# EAGLE board SEED_SOLD_SENSORS (EAGLE 7.6.0)
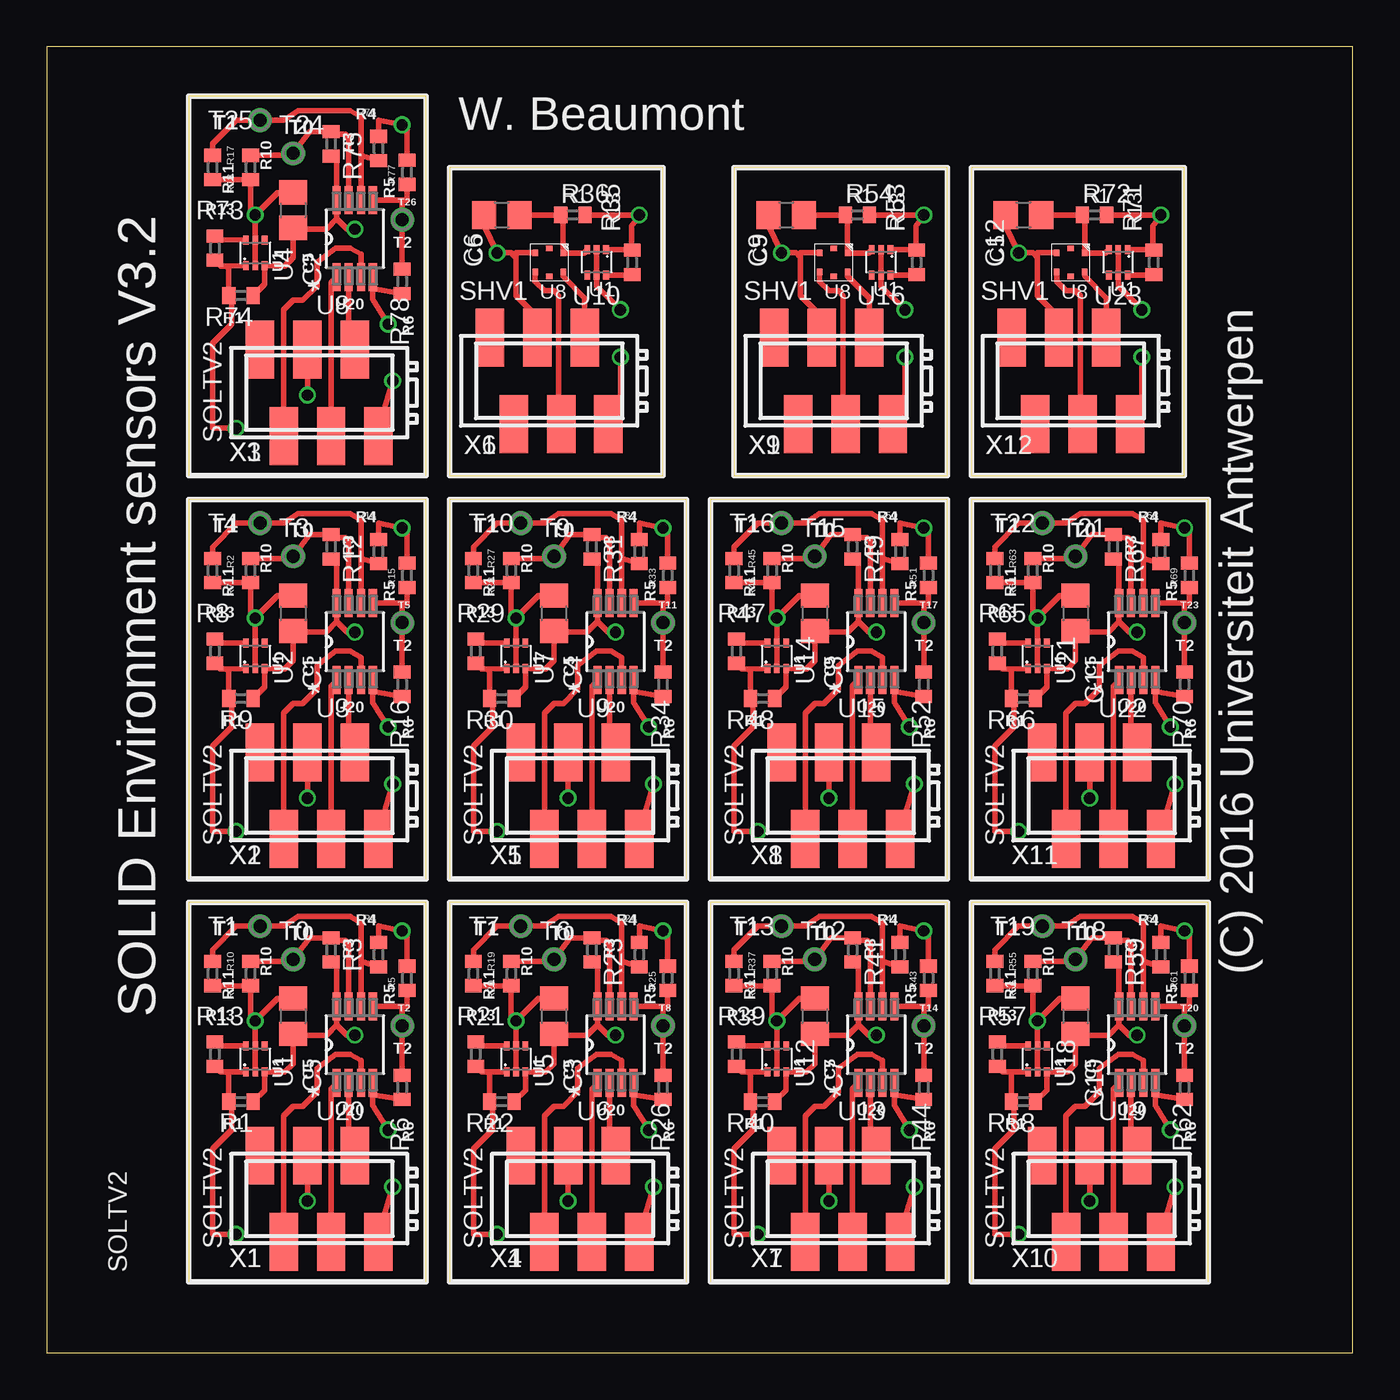
[diagram p0: board, top side]
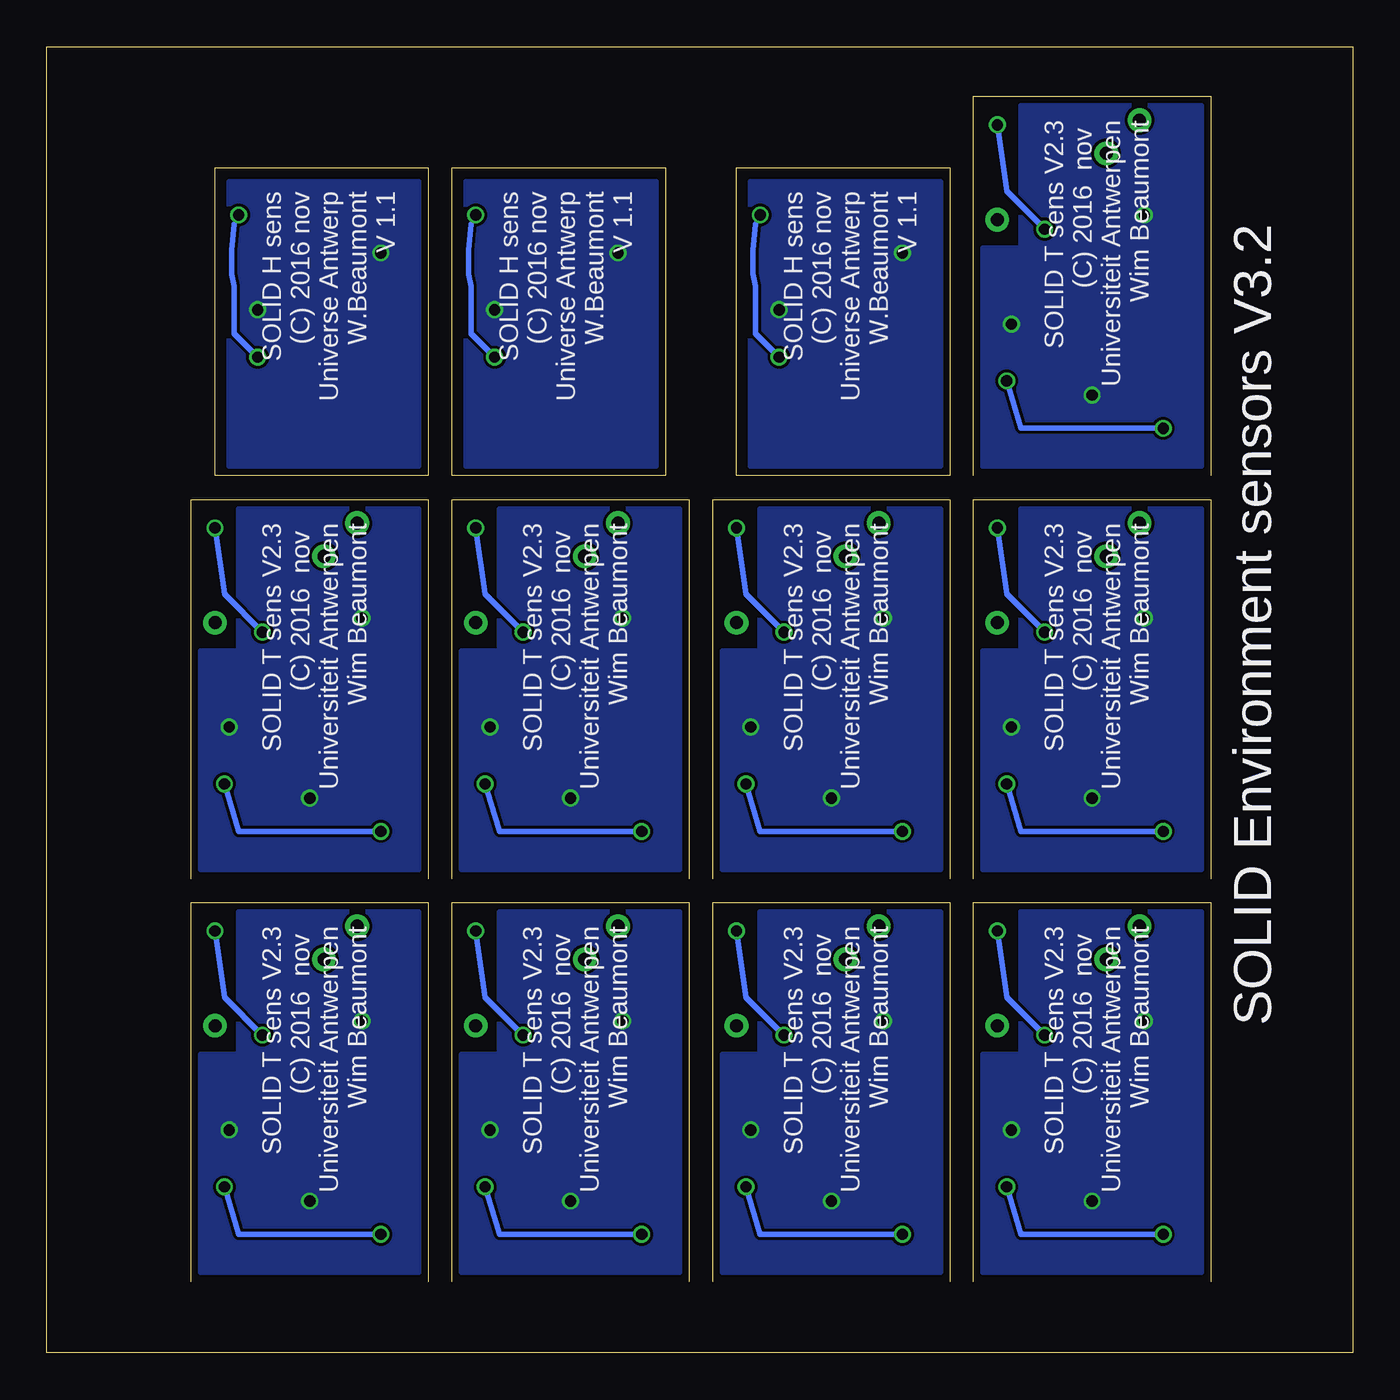
[diagram p1: board, bottom side, seen from below]

Size 69.98 x 69.98 mm. Coordinates in mm from the lower left corner, seen from the top.
Outline: 20.32,3.81 20.32,24.13 7.62,24.13 7.62,3.81
Outline: 20.32,25.4 20.32,45.72 7.62,45.72 7.62,25.4
Outline: 34.29,3.81 34.29,24.13 21.59,24.13 21.59,3.81
Outline: 34.29,25.4 34.29,45.72 21.59,45.72 21.59,25.4
Outline: 48.26,3.81 48.26,24.13 35.56,24.13 35.56,3.81
Outline: 48.26,25.4 48.26,45.72 35.56,45.72 35.56,25.4
Outline: 62.23,3.81 62.23,24.13 49.53,24.13 49.53,3.81
Outline: 62.23,25.4 62.23,45.72 49.53,45.72 49.53,25.4
Outline: 20.32,46.99 20.32,67.31 7.62,67.31 7.62,46.99
Outline: 0,0 69.98,0 69.98,69.98 0,69.98 0,0
Outline: 21.59,46.99 33.02,46.99 33.02,63.5 21.59,63.5 21.59,46.99
Outline: 36.83,46.99 48.26,46.99 48.26,63.5 36.83,63.5 36.83,46.99
Outline: 49.53,46.99 60.96,46.99 60.96,63.5 49.53,63.5 49.53,46.99
Copper layers (1*16): Top 0.035mm / dielectric 1.5mm / Bottom 0.035mm
Design rules "SeeedStudio_2layer_DRU_no_angle_20140221": minimum track width 6mil, minimum drill 12mil, track to track 6mil, track to pad 6mil, pad to pad 6mil, via to via 6mil, smd to smd 0mil, copper to edge 10mil, drill to drill 10mil, minimum pad ring 10mil, minimum via ring 6mil, stop-mask expansion 2mil, vias tented up to drill 100mil, thermal gap 10mil

## Footprints (pad centres in the part's own frame; a part is rotated, then mirrored left to right if it is on the bottom)
C0805 = smd 1.3 x 1.5: 1 -0.95,0; 2 0.95,0
R0402 = smd 0.7 x 0.9: 1 -0.65,0; 2 0.65,0
UA_P1-13 = drill 0.7 pad 1.27: TP 0,0
SOT563 = smd 0.305 x 0.483: 1 -0.5,-0.686; 2 0,-0.686; 3 0.5,-0.686; 4 0.5,0.686; 5 0,0.686; 6 -0.5,0.686
SOP65P490X110-8N = smd 1.499 x 0.432: 1 -2.057,0.965; 2 -2.057,0.33; 3 -2.057,-0.33; 4 -2.057,-0.965; 5 2.057,-0.965; 6 2.057,-0.33; 7 2.057,0.33; 8 2.057,0.965
HLGA-6 = smd 0.3 x 0.35: 1 0.75,0.5; 2 0.75,-0.5; 4 -0.75,-0.5; 5 -0.75,0.5 | smd 0.35 x 0.3: 3 0,-0.75; 6 0,0.75
MICROMATCH_SMD-6 = smd 1.524 x 3.1: 1 3.175,-2.311; 2 1.905,2.311; 3 0.635,-2.311; 4 -0.635,2.311; 5 -1.905,-2.311; 6 -3.175,2.311

## Placement (x,y rotation side)
C1  100n  [C0805]  13.21,39.62 270 top
C2  100n  [C0805]  13.21,61.21 270 top
C3  100n  [C0805]  27.18,18.03 270 top
C4  100n  [C0805]  27.18,39.62 270 top
C5  100n  [C0805]  13.21,18.03 270 top
C6  100n  [C0805]  24.38,60.96 0 top
C7  100n  [C0805]  41.15,18.03 270 top
C8  100n  [C0805]  41.15,39.62 270 top
C9  100n  [C0805]  39.62,60.96 0 top
C10  100n  [C0805]  55.12,18.03 270 top
C11  100n  [C0805]  55.12,39.62 270 top
C12  100n  [C0805]  52.32,60.96 0 top
R1  0R  [R0402]  10.41,13.46 180 top
R2  1K  [R0402]  10.92,41.91 90 top
R3  10K  [R0402]  15.24,21.59 270 top
R4  10K  [R0402]  17.78,21.34 90 top
R5  10K  [R0402]  19.3,20.07 90 top
R6  1K  [R0402]  19.05,14.22 90 top
R7  1K  [R0402]  8.89,41.91 90 top
R8  10K  [R0402]  9.02,37.59 270 top
R9  0R  [R0402]  10.41,35.05 180 top
R10  1K  [R0402]  10.92,20.32 90 top
R11  1K  [R0402]  8.89,20.32 90 top
R12  10K  [R0402]  15.24,43.18 270 top
R13  10K  [R0402]  9.02,16 270 top
R14  10K  [R0402]  17.78,42.93 90 top
R15  10K  [R0402]  19.3,41.66 90 top
R16  1K  [R0402]  19.05,35.81 90 top
R17  1K  [R0402]  10.92,63.5 90 top
R18  1K  [R0402]  8.89,63.5 90 top
R19  1K  [R0402]  24.89,20.32 90 top
R20  1K  [R0402]  22.86,20.32 90 top
R21  10K  [R0402]  22.99,16 270 top
R22  0R  [R0402]  24.38,13.46 180 top
R23  10K  [R0402]  29.21,21.59 270 top
R24  10K  [R0402]  31.75,21.34 90 top
R25  10K  [R0402]  33.27,20.07 90 top
R26  1K  [R0402]  33.02,14.22 90 top
R27  1K  [R0402]  24.89,41.91 90 top
R28  1K  [R0402]  22.86,41.91 90 top
R29  10K  [R0402]  22.99,37.59 270 top
R30  0R  [R0402]  24.38,35.05 180 top
R31  10K  [R0402]  29.21,43.18 270 top
R32  10K  [R0402]  31.75,42.93 90 top
R33  10K  [R0402]  33.27,41.66 90 top
R34  1K  [R0402]  33.02,35.81 90 top
R35  10K  [R0402]  31.37,58.42 90 top
R36  10K  [R0402]  28.19,60.96 0 top
R37  1K  [R0402]  38.86,20.32 90 top
R38  1K  [R0402]  36.83,20.32 90 top
R39  10K  [R0402]  36.96,16 270 top
R40  0R  [R0402]  38.35,13.46 180 top
R41  10K  [R0402]  43.18,21.59 270 top
R42  10K  [R0402]  45.72,21.34 90 top
R43  10K  [R0402]  47.24,20.07 90 top
R44  1K  [R0402]  46.99,14.22 90 top
R45  1K  [R0402]  38.86,41.91 90 top
R46  1K  [R0402]  36.83,41.91 90 top
R47  10K  [R0402]  36.96,37.59 270 top
R48  0R  [R0402]  38.35,35.05 180 top
R49  10K  [R0402]  43.18,43.18 270 top
R50  10K  [R0402]  45.72,42.93 90 top
R51  10K  [R0402]  47.24,41.66 90 top
R52  1K  [R0402]  46.99,35.81 90 top
R53  10K  [R0402]  46.61,58.42 90 top
R54  10K  [R0402]  43.43,60.96 0 top
R55  1K  [R0402]  52.83,20.32 90 top
R56  1K  [R0402]  50.8,20.32 90 top
R57  10K  [R0402]  50.93,16 270 top
R58  0R  [R0402]  52.32,13.46 180 top
R59  10K  [R0402]  57.15,21.59 270 top
R60  10K  [R0402]  59.69,21.34 90 top
R61  10K  [R0402]  61.21,20.07 90 top
R62  1K  [R0402]  60.96,14.22 90 top
R63  1K  [R0402]  52.83,41.91 90 top
R64  1K  [R0402]  50.8,41.91 90 top
R65  10K  [R0402]  50.93,37.59 270 top
R66  0R  [R0402]  52.32,35.05 180 top
R67  10K  [R0402]  57.15,43.18 270 top
R68  10K  [R0402]  59.69,42.93 90 top
R69  10K  [R0402]  61.21,41.66 90 top
R70  1K  [R0402]  60.96,35.81 90 top
R71  10K  [R0402]  59.31,58.42 90 top
R72  10K  [R0402]  56.13,60.96 0 top
R73  10K  [R0402]  9.02,59.18 270 top
R74  0R  [R0402]  10.41,56.64 180 top
R75  10K  [R0402]  15.24,64.77 270 top
R76  10K  [R0402]  17.78,64.52 90 top
R77  10K  [R0402]  19.3,63.25 90 top
R78  1K  [R0402]  19.05,57.4 90 top
T0  UA_TPPAD1-13  [UA_P1-13]  13.21,21.08 0 top
T1  UA_TPPAD1-13  [UA_P1-13]  11.43,22.86 0 top
T2  UA_TPPAD1-13  [UA_P1-13]  19.05,17.53 0 top
T3  UA_TPPAD1-13  [UA_P1-13]  13.21,42.67 0 top
T4  UA_TPPAD1-13  [UA_P1-13]  11.43,44.45 0 top
T5  UA_TPPAD1-13  [UA_P1-13]  19.05,39.12 0 top
T6  UA_TPPAD1-13  [UA_P1-13]  27.18,21.08 0 top
T7  UA_TPPAD1-13  [UA_P1-13]  25.4,22.86 0 top
T8  UA_TPPAD1-13  [UA_P1-13]  33.02,17.53 0 top
T9  UA_TPPAD1-13  [UA_P1-13]  27.18,42.67 0 top
T10  UA_TPPAD1-13  [UA_P1-13]  25.4,44.45 0 top
T11  UA_TPPAD1-13  [UA_P1-13]  33.02,39.12 0 top
T12  UA_TPPAD1-13  [UA_P1-13]  41.15,21.08 0 top
T13  UA_TPPAD1-13  [UA_P1-13]  39.37,22.86 0 top
T14  UA_TPPAD1-13  [UA_P1-13]  46.99,17.53 0 top
T15  UA_TPPAD1-13  [UA_P1-13]  41.15,42.67 0 top
T16  UA_TPPAD1-13  [UA_P1-13]  39.37,44.45 0 top
T17  UA_TPPAD1-13  [UA_P1-13]  46.99,39.12 0 top
T18  UA_TPPAD1-13  [UA_P1-13]  55.12,21.08 0 top
T19  UA_TPPAD1-13  [UA_P1-13]  53.34,22.86 0 top
T20  UA_TPPAD1-13  [UA_P1-13]  60.96,17.53 0 top
T21  UA_TPPAD1-13  [UA_P1-13]  55.12,42.67 0 top
T22  UA_TPPAD1-13  [UA_P1-13]  53.34,44.45 0 top
T23  UA_TPPAD1-13  [UA_P1-13]  60.96,39.12 0 top
T24  UA_TPPAD1-13  [UA_P1-13]  13.21,64.26 0 top
T25  UA_TPPAD1-13  [UA_P1-13]  11.43,66.04 0 top
T26  UA_TPPAD1-13  [UA_P1-13]  19.05,60.71 0 top
U1  NCP170_3V3  [SOT563]  11.18,15.75 0 top
U2  NCP170_3V3  [SOT563]  11.18,37.34 0 top
U3  AT30TSE752-XM8-B  [SOP65P490X110-8N]  16.51,38.1 90 top
U4  NCP170_3V3  [SOT563]  11.18,58.93 0 top
U5  NCP170_3V3  [SOT563]  25.15,15.75 0 top
U6  AT30TSE752-XM8-B  [SOP65P490X110-8N]  30.48,16.51 90 top
U7  NCP170_3V3  [SOT563]  25.15,37.34 0 top
U8  AT30TSE752-XM8-B  [SOP65P490X110-8N]  16.51,59.69 90 top
U9  AT30TSE752-XM8-B  [SOP65P490X110-8N]  30.48,38.1 90 top
U10  NCP170_3V3  [SOT563]  29.46,58.42 180 top
U11  HTS221  [HLGA-6]  26.92,58.42 0 top
U12  NCP170_3V3  [SOT563]  39.12,15.75 0 top
U13  AT30TSE752-XM8-B  [SOP65P490X110-8N]  44.45,16.51 90 top
U14  NCP170_3V3  [SOT563]  39.12,37.34 0 top
U15  AT30TSE752-XM8-B  [SOP65P490X110-8N]  44.45,38.1 90 top
U16  NCP170_3V3  [SOT563]  44.7,58.42 180 top
U17  HTS221  [HLGA-6]  42.16,58.42 0 top
U18  NCP170_3V3  [SOT563]  53.09,15.75 0 top
U19  AT30TSE752-XM8-B  [SOP65P490X110-8N]  58.42,16.51 90 top
U20  AT30TSE752-XM8-B  [SOP65P490X110-8N]  16.51,16.51 90 top
U21  NCP170_3V3  [SOT563]  53.09,37.34 0 top
U22  AT30TSE752-XM8-B  [SOP65P490X110-8N]  58.42,38.1 90 top
U23  NCP170_3V3  [SOT563]  57.4,58.42 180 top
U24  HTS221  [HLGA-6]  54.86,58.42 0 top
X1  MICROMATCH-6SMD  [MICROMATCH_SMD-6]  14.61,8.26 0 top
X2  MICROMATCH-6SMD  [MICROMATCH_SMD-6]  14.61,29.84 0 top
X3  MICROMATCH-6SMD  [MICROMATCH_SMD-6]  14.61,51.44 0 top
X4  MICROMATCH-6SMD  [MICROMATCH_SMD-6]  28.57,8.26 0 top
X5  MICROMATCH-6SMD  [MICROMATCH_SMD-6]  28.57,29.84 0 top
X6  MICROMATCH-6SMD  [MICROMATCH_SMD-6]  26.92,52.07 0 top
X7  MICROMATCH-6SMD  [MICROMATCH_SMD-6]  42.55,8.26 0 top
X8  MICROMATCH-6SMD  [MICROMATCH_SMD-6]  42.55,29.84 0 top
X9  MICROMATCH-6SMD  [MICROMATCH_SMD-6]  42.16,52.07 0 top
X10  MICROMATCH-6SMD  [MICROMATCH_SMD-6]  56.52,8.26 0 top
X11  MICROMATCH-6SMD  [MICROMATCH_SMD-6]  56.52,29.84 0 top
X12  MICROMATCH-6SMD  [MICROMATCH_SMD-6]  54.86,52.07 0 top

## Library data of the parts
C1-C12 = rcl; PARTNO: *
R1-R78 = rcl
T0 T1-T26 = UA_v2; PARTNO: *
U1 U2 U4 U5 U7 U10 U12 U14 U16 U18 U21 U23 = UA_v2; MPN: NCP170AXV330T2G; OC_FARNELL: 2507604; SUPPLIER: ON
U3 U6 U8 U9 U13 U15 U19 U20 U22 = at305sse752; MPN: AT30TSE752-XM8-B; OC_FARNELL: 2115206; OC_NEWARK: Unknown; PACKAGE: MSOP-8; SUPPLIER: ATMEL
U11 U17 U24 = chips; MPN: HTS221; OC_FARNELL: 2433085; SUPPLIER: ST
X1-X12 = ua_cmp; MPN: 7-188275-6; OC_FARNELL: 1056234

## Nets
GND: C5.1 R6.1 R10.1 R11.1 U1.2 U1.5 U20.4 X1.4
GND1: C1.1 R2.1 R7.1 R16.1 U2.2 U2.5 U3.4 X2.4
GND2: C2.1 R17.1 R18.1 R78.1 U4.2 U4.5 U8.4 X3.4
GND3: C3.1 R19.1 R20.1 R26.1 U5.2 U5.5 U6.4 X4.4
GND4: C4.1 R27.1 R28.1 R34.1 U7.2 U7.5 U9.4 X5.4
GND5: C6.1 U10.2 U10.5 U11.5 X6.4
GND6: C7.1 R37.1 R38.1 R44.1 U12.2 U12.5 U13.4 X7.4
GND7: C8.1 R45.1 R46.1 R52.1 U14.2 U14.5 U15.4 X8.4
GND8: C9.1 U16.2 U16.5 U17.5 X9.4
GND9: C10.1 R55.1 R56.1 R62.1 U18.2 U18.5 U19.4 X10.4
GND10: C11.1 R63.1 R64.1 R70.1 U21.2 U21.5 U22.4 X11.4
GND11: C12.1 U23.2 U23.5 U24.5 X12.4
N$1: R5.1 R6.2 T2.TP U20.5
N$2: R4.1 R11.2 T1.TP U20.6
N$3: R3.1 R10.2 T0.TP U20.7
N$4: R8.1 U2.6
N$5: R15.1 R16.2 T5.TP U3.5
N$6: R7.2 R14.1 T4.TP U3.6
N$7: R13.1 U1.6
N$8: R2.2 R12.1 T3.TP U3.7
N$9: R73.1 U4.6
N$10: R21.1 U5.6
N$11: R25.1 R26.2 T8.TP U6.5
N$12: R20.2 R24.1 T7.TP U6.6
N$13: R19.2 R23.1 T6.TP U6.7
N$14: R29.1 U7.6
N$15: R33.1 R34.2 T11.TP U9.5
N$16: R28.2 R32.1 T10.TP U9.6
N$17: R27.2 R31.1 T9.TP U9.7
N$18: R35.1 U10.6
N$19: R39.1 U12.6
N$20: R43.1 R44.2 T14.TP U13.5
N$21: R38.2 R42.1 T13.TP U13.6
N$22: R37.2 R41.1 T12.TP U13.7
N$23: R47.1 U14.6
N$24: R51.1 R52.2 T17.TP U15.5
N$25: R46.2 R50.1 T16.TP U15.6
N$26: R45.2 R49.1 T15.TP U15.7
N$27: R53.1 U16.6
N$28: R57.1 U18.6
N$29: R61.1 R62.2 T20.TP U19.5
N$30: R56.2 R60.1 T19.TP U19.6
N$31: R55.2 R59.1 T18.TP U19.7
N$32: R65.1 U21.6
N$33: R69.1 R70.2 T23.TP U22.5
N$34: R64.2 R68.1 T22.TP U22.6
N$35: R63.2 R67.1 T21.TP U22.7
N$36: R71.1 U23.6
N$37: R77.1 R78.2 T26.TP U8.5
N$38: R18.2 R76.1 T25.TP U8.6
N$39: R17.2 R75.1 T24.TP U8.7
SCL_L: U20.2 X1.2
SCL_L1: U3.2 X2.2
SCL_L2: U8.2 X3.2
SCL_L3: U6.2 X4.2
SCL_L4: U9.2 X5.2
SCL_L5: U11.2 X6.2
SCL_L6: U13.2 X7.2
SCL_L7: U15.2 X8.2
SCL_L8: U17.2 X9.2
SCL_L9: U19.2 X10.2
SCL_L10: U22.2 X11.2
SCL_L11: U24.2 X12.2
SDA_L: U20.1 X1.3
SDA_L1: U3.1 X2.3
SDA_L2: U8.1 X3.3
SDA_L3: U6.1 X4.3
SDA_L4: U9.1 X5.3
SDA_L5: U11.4 X6.3
SDA_L6: U13.1 X7.3
SDA_L7: U15.1 X8.3
SDA_L8: U17.4 X9.3
SDA_L9: U19.1 X10.3
SDA_L10: U22.1 X11.3
SDA_L11: U24.4 X12.3
TALERT: U20.3 X1.5
TALERT1: U3.3 X2.5
TALERT2: U8.3 X3.5
TALERT3: U6.3 X4.5
TALERT4: U9.3 X5.5
TALERT5: X6.5
TALERT6: U13.3 X7.5
TALERT7: U15.3 X8.5
TALERT8: X9.5
TALERT9: U19.3 X10.5
TALERT10: U22.3 X11.5
TALERT11: X12.5
V3_3L: C5.2 R1.1 R3.2 R4.2 R5.2 U1.3 U20.8
V3_3L1: C1.2 R9.1 R12.2 R14.2 R15.2 U2.3 U3.8
V3_3L2: C2.2 R74.1 R75.2 R76.2 R77.2 U4.3 U8.8
V3_3L3: C3.2 R22.1 R23.2 R24.2 R25.2 U5.3 U6.8
V3_3L4: C4.2 R30.1 R31.2 R32.2 R33.2 U7.3 U9.8
V3_3L5: C6.2 R36.1 U10.3 U11.1
V3_3L6: C7.2 R40.1 R41.2 R42.2 R43.2 U12.3 U13.8
V3_3L7: C8.2 R48.1 R49.2 R50.2 R51.2 U14.3 U15.8
V3_3L8: C9.2 R54.1 U16.3 U17.1
V3_3L9: C10.2 R58.1 R59.2 R60.2 R61.2 U18.3 U19.8
V3_3L10: C11.2 R66.1 R67.2 R68.2 R69.2 U21.3 U22.8
V3_3L11: C12.2 R72.1 U23.3 U24.1
V5F: R1.2 R13.2 U1.1 X1.1
V5F1: R8.2 R9.2 U2.1 X2.1
V5F2: R73.2 R74.2 U4.1 X3.1
V5F3: R21.2 R22.2 U5.1 X4.1
V5F4: R29.2 R30.2 U7.1 X5.1
V5F5: R35.2 R36.2 U10.1 X6.1
V5F6: R39.2 R40.2 U12.1 X7.1
V5F7: R47.2 R48.2 U14.1 X8.1
V5F8: R53.2 R54.2 U16.1 X9.1
V5F9: R57.2 R58.2 U18.1 X10.1
V5F10: R65.2 R66.2 U21.1 X11.1
V5F11: R71.2 R72.2 U23.1 X12.1

## Tracks (layer width: path | path; a pad name or v marks a point on that pad's centre or on a via)
GND  (via drill 0.6)
  Top 0.305: v18.29,11.94 17.48,13.26 U20.4 17.48,13.83 R6.1 | U1.2 U1.5 v11.18,17.78 | v13.97,8.13 X1.4 | C5.1 12.38,18.98 v11.18,17.78 | R11.1 R10.1 10.92,18.03 v11.18,17.78
  pour Bottom: 8.13,23.62 8.13,4.32 19.81,4.32 19.81,16 17.78,16 17.78,23.62
GND1  (via drill 0.6)
  Top 0.305: v18.29,33.53 17.48,34.85 U3.4 17.48,35.42 R16.1 | U2.2 U2.5 v11.18,39.37 | v13.97,29.72 X2.4 | C1.1 12.38,40.57 v11.18,39.37 | R7.1 R2.1 10.92,39.62 v11.18,39.37
  pour Bottom: 8.13,45.21 8.13,25.91 19.81,25.91 19.81,37.59 17.78,37.59 17.78,45.21
GND2  (via drill 0.6)
  Top 0.305: v18.29,55.12 17.48,56.44 U8.4 17.48,57.01 R78.1 | U4.2 U4.5 v11.18,60.96 | v13.97,51.31 X3.4 | C2.1 12.38,62.16 v11.18,60.96 | R18.1 R17.1 10.92,61.21 v11.18,60.96
  pour Bottom: 8.13,66.8 8.13,47.5 19.81,47.5 19.81,59.18 17.78,59.18 17.78,66.8
GND3  (via drill 0.6)
  Top 0.305: v32.26,11.94 31.45,13.26 U6.4 31.45,13.83 R26.1 | U5.2 U5.5 v25.15,17.78 | v27.94,8.13 X4.4 | C3.1 26.35,18.98 v25.15,17.78 | R20.1 R19.1 24.89,18.03 v25.15,17.78
  pour Bottom: 22.1,23.62 22.1,4.32 33.78,4.32 33.78,16 31.75,16 31.75,23.62
GND4  (via drill 0.6)
  Top 0.305: v32.26,33.53 31.45,34.85 U9.4 31.45,35.42 R34.1 | U7.2 U7.5 v25.15,39.37 | v27.94,29.72 X5.4 | C4.1 26.35,40.57 v25.15,39.37 | R28.1 R27.1 24.89,39.62 v25.15,39.37
  pour Bottom: 22.1,45.21 22.1,25.91 33.78,25.91 33.78,37.59 31.75,37.59 31.75,45.21
GND5  (via drill 0.6)
  Top 0.305: X6.4 26.29,55.5 25.15,56.64 25.15,58.67 | 25.15,58.67 25.15,58.93 U11.5 | C6.1 23.43,60.39 v24.13,58.93 24.89,58.93 25.15,58.67 | U10.2 U10.5 29.46,57.15 v30.73,55.88
  pour Bottom: 22.1,62.74 32.26,62.74 32.26,47.5 22.1,47.5
GND6  (via drill 0.6)
  Top 0.305: v46.23,11.94 45.41,13.26 U13.4 45.41,13.83 R44.1 | U12.2 U12.5 v39.12,17.78 | v41.91,8.13 X7.4 | C7.1 40.32,18.98 v39.12,17.78 | R38.1 R37.1 38.86,18.03 v39.12,17.78
  pour Bottom: 36.07,23.62 36.07,4.32 47.75,4.32 47.75,16 45.72,16 45.72,23.62
GND7  (via drill 0.6)
  Top 0.305: v46.23,33.53 45.41,34.85 U15.4 45.41,35.42 R52.1 | U14.2 U14.5 v39.12,39.37 | v41.91,29.72 X8.4 | C8.1 40.32,40.57 v39.12,39.37 | R46.1 R45.1 38.86,39.62 v39.12,39.37
  pour Bottom: 36.07,45.21 36.07,25.91 47.75,25.91 47.75,37.59 45.72,37.59 45.72,45.21
GND8  (via drill 0.6)
  Top 0.305: X9.4 41.53,55.5 40.39,56.64 40.39,58.67 | 40.39,58.67 40.39,58.93 U17.5 | C9.1 38.67,60.39 v39.37,58.93 40.13,58.93 40.39,58.67 | U16.2 U16.5 44.7,57.15 v45.97,55.88
  pour Bottom: 37.34,62.74 47.5,62.74 47.5,47.5 37.34,47.5
GND9  (via drill 0.6)
  Top 0.305: v60.2,11.94 59.38,13.26 U19.4 59.38,13.83 R62.1 | U18.2 U18.5 v53.09,17.78 | v55.88,8.13 X10.4 | C10.1 54.29,18.98 v53.09,17.78 | R56.1 R55.1 52.83,18.03 v53.09,17.78
  pour Bottom: 50.04,23.62 50.04,4.32 61.72,4.32 61.72,16 59.69,16 59.69,23.62
GND10  (via drill 0.6)
  Top 0.305: v60.2,33.53 59.38,34.85 U22.4 59.38,35.42 R70.1 | U21.2 U21.5 v53.09,39.37 | v55.88,29.72 X11.4 | C11.1 54.29,40.57 v53.09,39.37 | R64.1 R63.1 52.83,39.62 v53.09,39.37
  pour Bottom: 50.04,45.21 50.04,25.91 61.72,25.91 61.72,37.59 59.69,37.59 59.69,45.21
GND11  (via drill 0.6)
  Top 0.305: X12.4 54.23,55.5 53.09,56.64 53.09,58.67 | 53.09,58.67 53.09,58.93 U24.5 | C12.1 51.37,60.39 v52.07,58.93 52.83,58.93 53.09,58.67 | U23.2 U23.5 57.4,57.15 v58.67,55.88
  pour Bottom: 50.04,62.74 60.2,62.74 60.2,47.5 50.04,47.5
N$1
  Top 0.305: R5.1 19.3,18.54 19.28,18.57 19.05,18.57 | U20.5 19.05,18.57 | R6.2 T2.TP 19.05,18.57
N$2
  Top 0.305: R11.2 8.89,21.59 10.16,22.86 T1.TP 12.7,22.86 13.46,23.37 16.26,23.37 16.84,23.04 16.84,20.83 | U20.6 16.84,20.83 | R4.1 16.95,20.94 16.84,20.83
N$3
  Top 0.305: U20.7 16.18,21.92 16,22.1 15.38,22.1 R3.1 14.08,22.24 T0.TP 13.1,20.97 R10.2
N$4
  Top 0.305: U2.6 9.22,38.04 R8.1
N$5
  Top 0.305: R15.1 19.3,40.13 19.28,40.16 19.05,40.16 | U3.5 19.05,40.16 | R16.2 T5.TP 19.05,40.16
N$6
  Top 0.305: R7.2 8.89,43.18 10.16,44.45 T4.TP 12.7,44.45 13.46,44.96 16.26,44.96 16.84,44.63 16.84,42.42 | U3.6 16.84,42.42 | R14.1 16.95,42.53 16.84,42.42
N$7
  Top 0.305: U1.6 9.22,16.45 R13.1
N$8
  Top 0.305: U3.7 16.18,43.51 16,43.69 15.38,43.69 R12.1 14.08,43.83 T3.TP 13.1,42.56 R2.2
N$9
  Top 0.305: U4.6 9.22,59.63 R73.1
N$10
  Top 0.305: U5.6 23.19,16.45 R21.1
N$11
  Top 0.305: R25.1 33.27,18.54 33.25,18.57 33.02,18.57 | U6.5 33.02,18.57 | R26.2 T8.TP 33.02,18.57
N$12
  Top 0.305: R20.2 22.86,21.59 24.13,22.86 T7.TP 26.67,22.86 27.43,23.37 30.23,23.37 30.81,23.04 30.81,20.83 | U6.6 30.81,20.83 | R24.1 30.92,20.94 30.81,20.83
N$13
  Top 0.305: U6.7 30.15,21.92 29.97,22.1 29.35,22.1 R23.1 28.05,22.24 T6.TP 27.07,20.97 R19.2
N$14
  Top 0.305: U7.6 23.19,38.04 R29.1
N$15
  Top 0.305: R33.1 33.27,40.13 33.25,40.16 33.02,40.16 | U9.5 33.02,40.16 | R34.2 T11.TP 33.02,40.16
N$16
  Top 0.305: R28.2 22.86,43.18 24.13,44.45 T10.TP 26.67,44.45 27.43,44.96 30.23,44.96 30.81,44.63 30.81,42.42 | U9.6 30.81,42.42 | R32.1 30.92,42.53 30.81,42.42
N$17
  Top 0.305: U9.7 30.15,43.51 29.97,43.69 29.35,43.69 R31.1 28.05,43.83 T9.TP 27.07,42.56 R27.2
N$18
  Top 0.305: U10.6 31.33,57.73 R35.1
N$19
  Top 0.305: U12.6 37.16,16.45 R39.1
N$20
  Top 0.305: R43.1 47.24,18.54 47.22,18.57 46.99,18.57 | U13.5 46.99,18.57 | R44.2 T14.TP 46.99,18.57
N$21
  Top 0.305: R38.2 36.83,21.59 38.1,22.86 T13.TP 40.64,22.86 41.4,23.37 44.2,23.37 44.78,23.04 44.78,20.83 | U13.6 44.78,20.83 | R42.1 44.89,20.94 44.78,20.83
N$22
  Top 0.305: U13.7 44.12,21.92 43.94,22.1 43.32,22.1 R41.1 42.02,22.24 T12.TP 41.04,20.97 R37.2
N$23
  Top 0.305: U14.6 37.16,38.04 R47.1
N$24
  Top 0.305: R51.1 47.24,40.13 47.22,40.16 46.99,40.16 | U15.5 46.99,40.16 | R52.2 T17.TP 46.99,40.16
N$25
  Top 0.305: R46.2 36.83,43.18 38.1,44.45 T16.TP 40.64,44.45 41.4,44.96 44.2,44.96 44.78,44.63 44.78,42.42 | U15.6 44.78,42.42 | R50.1 44.89,42.53 44.78,42.42
N$26
  Top 0.305: U15.7 44.12,43.51 43.94,43.69 43.32,43.69 R49.1 42.02,43.83 T15.TP 41.04,42.56 R45.2
N$27
  Top 0.305: U16.6 46.57,57.73 R53.1
N$28
  Top 0.305: U18.6 51.13,16.45 R57.1
N$29
  Top 0.305: R61.1 61.21,18.54 61.19,18.57 60.96,18.57 | U19.5 60.96,18.57 | R62.2 T20.TP 60.96,18.57
N$30
  Top 0.305: R56.2 50.8,21.59 52.07,22.86 T19.TP 54.61,22.86 55.37,23.37 58.17,23.37 58.75,23.04 58.75,20.83 | U19.6 58.75,20.83 | R60.1 58.86,20.94 58.75,20.83
N$31
  Top 0.305: U19.7 58.09,21.92 57.91,22.1 57.29,22.1 R59.1 55.99,22.24 T18.TP 55.01,20.97 R55.2
N$32
  Top 0.305: U21.6 51.13,38.04 R65.1
N$33
  Top 0.305: R69.1 61.21,40.13 61.19,40.16 60.96,40.16 | U22.5 60.96,40.16 | R70.2 T23.TP 60.96,40.16
N$34
  Top 0.305: R64.2 50.8,43.18 52.07,44.45 T22.TP 54.61,44.45 55.37,44.96 58.17,44.96 58.75,44.63 58.75,42.42 | U22.6 58.75,42.42 | R68.1 58.86,42.53 58.75,42.42
N$35
  Top 0.305: U22.7 58.09,43.51 57.91,43.69 57.29,43.69 R67.1 55.99,43.83 T21.TP 55.01,42.56 R63.2
N$36
  Top 0.305: U23.6 59.27,57.73 R71.1
N$37
  Top 0.305: R77.1 19.3,61.72 19.28,61.75 19.05,61.75 | U8.5 19.05,61.75 | R78.2 T26.TP 19.05,61.75
N$38
  Top 0.305: R18.2 8.89,64.77 10.16,66.04 T25.TP 12.7,66.04 13.46,66.55 16.26,66.55 16.84,66.22 16.84,64.01 | U8.6 16.84,64.01 | R76.1 16.95,64.12 16.84,64.01
N$39
  Top 0.305: U8.7 16.18,65.1 16,65.28 15.38,65.28 R75.1 14.08,65.42 T24.TP 13.1,64.15 R17.2
SCL_L
  Top 0.305: U20.2 16.18,10.9 X1.2
SCL_L1
  Top 0.305: U3.2 16.18,32.49 X2.2
SCL_L2
  Top 0.305: U8.2 16.18,54.08 X3.2
SCL_L3
  Top 0.305: U6.2 30.15,10.9 X4.2
SCL_L4
  Top 0.305: U9.2 30.15,32.49 X5.2
SCL_L5
  Top 0.305: X6.2 28.83,56.52 27.67,57.67 U11.2
SCL_L6
  Top 0.305: U13.2 44.12,10.9 X7.2
SCL_L7
  Top 0.305: U15.2 44.12,32.49 X8.2
SCL_L8
  Top 0.305: X9.2 44.07,56.52 42.91,57.67 U17.2
SCL_L9
  Top 0.305: U19.2 58.09,10.9 X10.2
SCL_L10
  Top 0.305: U22.2 58.09,32.49 X11.2
SCL_L11
  Top 0.305: X12.2 56.77,56.52 55.61,57.67 U24.2
SDA_L
  Top 0.305: X1.3 15.24,14.15 U20.1
SDA_L1
  Top 0.305: X2.3 15.24,35.74 U3.1
SDA_L2
  Top 0.305: X3.3 15.24,57.33 U8.1
SDA_L3
  Top 0.305: X4.3 29.21,14.15 U6.1
SDA_L4
  Top 0.305: X5.3 29.21,35.74 U9.1
SDA_L5
  Top 0.305: U11.4 26.17,57.39 26.67,56.9 27.18,56.9 27.43,56.64 27.43,49.89 X6.3
SDA_L6
  Top 0.305: X7.3 43.18,14.15 U13.1
SDA_L7
  Top 0.305: X8.3 43.18,35.74 U15.1
SDA_L8
  Top 0.305: U17.4 41.41,57.39 41.91,56.9 42.42,56.9 42.67,56.64 42.67,49.89 X9.3
SDA_L9
  Top 0.305: X10.3 57.15,14.15 U19.1
SDA_L10
  Top 0.305: X11.3 57.15,35.74 U22.1
SDA_L11
  Top 0.305: U24.4 54.11,57.39 54.61,56.9 55.12,56.9 55.37,56.64 55.37,49.89 X12.3
TALERT
  Top 0.305: U20.3 16.84,15.67 16.26,16 15.49,16 14.48,15.24 14.48,13.97 13.72,13.21 13.21,13.21 12.7,12.7 X1.5
TALERT1
  Top 0.305: U3.3 16.84,37.26 16.26,37.59 15.49,37.59 14.48,36.83 14.48,35.56 13.72,34.8 13.21,34.8 12.7,34.29 X2.5
TALERT2
  Top 0.305: U8.3 16.84,58.85 16.26,59.18 15.49,59.18 14.48,58.42 14.48,57.15 13.72,56.39 13.21,56.39 12.7,55.88 X3.5
TALERT3
  Top 0.305: U6.3 30.81,15.67 30.23,16 29.46,16 28.45,15.24 28.45,13.97 27.69,13.21 27.18,13.21 26.67,12.7 X4.5
TALERT4
  Top 0.305: U9.3 30.81,37.26 30.23,37.59 29.46,37.59 28.45,36.83 28.45,35.56 27.69,34.8 27.18,34.8 26.67,34.29 X5.5
TALERT6
  Top 0.305: U13.3 44.78,15.67 44.2,16 43.43,16 42.42,15.24 42.42,13.97 41.66,13.21 41.15,13.21 40.64,12.7 X7.5
TALERT7
  Top 0.305: U15.3 44.78,37.26 44.2,37.59 43.43,37.59 42.42,36.83 42.42,35.56 41.66,34.8 41.15,34.8 40.64,34.29 X8.5
TALERT9
  Top 0.305: U19.3 58.75,15.67 58.17,16 57.4,16 56.39,15.24 56.39,13.97 55.63,13.21 55.12,13.21 54.61,12.7 X10.5
TALERT10
  Top 0.305: U22.3 58.75,37.26 58.17,37.59 57.4,37.59 56.39,36.83 56.39,35.56 55.63,34.8 55.12,34.8 54.61,34.29 X11.5
V3_3L  (via drill 0.6)
  Top 0.305: R1.1 11.68,14.07 U1.3 12.76,15.05 13.21,15.49 C5.2 13.27,17.02 14.99,17.02 15.54,17.58 | 15.54,17.58 U20.8 15.54,20.64 R3.2 | R4.2 17.78,22.86 v19.05,22.61 19.3,22.35 R5.2 | v16.51,17.02 16.1,17.02 15.54,17.58
  Bottom 0.305: v19.05,22.61 18.54,19.05 v16.51,17.02
V3_3L1  (via drill 0.6)
  Top 0.305: R9.1 11.68,35.66 U2.3 12.76,36.64 13.21,37.08 C1.2 13.27,38.61 14.99,38.61 15.54,39.17 | 15.54,39.17 U3.8 15.54,42.23 R12.2 | R14.2 17.78,44.45 v19.05,44.2 19.3,43.94 R15.2 | v16.51,38.61 16.1,38.61 15.54,39.17
  Bottom 0.305: v19.05,44.2 18.54,40.64 v16.51,38.61
V3_3L2  (via drill 0.6)
  Top 0.305: R74.1 11.68,57.25 U4.3 12.76,58.23 13.21,58.67 C2.2 13.27,60.2 14.99,60.2 15.54,60.76 | 15.54,60.76 U8.8 15.54,63.81 R75.2 | R76.2 17.78,66.04 v19.05,65.79 19.3,65.53 R77.2 | v16.51,60.2 16.1,60.2 15.54,60.76
  Bottom 0.305: v19.05,65.79 18.54,62.23 v16.51,60.2
V3_3L3  (via drill 0.6)
  Top 0.305: R22.1 25.65,14.07 U5.3 26.73,15.05 27.18,15.49 C3.2 27.24,17.02 28.96,17.02 29.52,17.58 | 29.52,17.58 U6.8 29.52,20.64 R23.2 | R24.2 31.75,22.86 v33.02,22.61 33.27,22.35 R25.2 | v30.48,17.02 30.07,17.02 29.52,17.58
  Bottom 0.305: v33.02,22.61 32.51,19.05 v30.48,17.02
V3_3L4  (via drill 0.6)
  Top 0.305: R30.1 25.65,35.66 U7.3 26.73,36.64 27.18,37.08 C4.2 27.24,38.61 28.96,38.61 29.52,39.17 | 29.52,39.17 U9.8 29.52,42.23 R31.2 | R32.2 31.75,44.45 v33.02,44.2 33.27,43.94 R33.2 | v30.48,38.61 30.07,38.61 29.52,39.17
  Bottom 0.305: v33.02,44.2 32.51,40.64 v30.48,38.61
V3_3L5
  Top 0.305: U10.3 28.78,58.92 U11.1 27.67,60.83 R36.1 C6.2
V3_3L6  (via drill 0.6)
  Top 0.305: R40.1 39.62,14.07 U12.3 40.7,15.05 41.15,15.49 C7.2 41.21,17.02 42.93,17.02 43.48,17.58 | 43.48,17.58 U13.8 43.48,20.64 R41.2 | R42.2 45.72,22.86 v46.99,22.61 47.24,22.35 R43.2 | v44.45,17.02 44.04,17.02 43.48,17.58
  Bottom 0.305: v46.99,22.61 46.48,19.05 v44.45,17.02
V3_3L7  (via drill 0.6)
  Top 0.305: R48.1 39.62,35.66 U14.3 40.7,36.64 41.15,37.08 C8.2 41.21,38.61 42.93,38.61 43.48,39.17 | 43.48,39.17 U15.8 43.48,42.23 R49.2 | R50.2 45.72,44.45 v46.99,44.2 47.24,43.94 R51.2 | v44.45,38.61 44.04,38.61 43.48,39.17
  Bottom 0.305: v46.99,44.2 46.48,40.64 v44.45,38.61
V3_3L8
  Top 0.305: U16.3 44.02,58.92 U17.1 42.91,60.83 R54.1 C9.2
V3_3L9  (via drill 0.6)
  Top 0.305: R58.1 53.59,14.07 U18.3 54.67,15.05 55.12,15.49 C10.2 55.18,17.02 56.9,17.02 57.45,17.58 | 57.45,17.58 U19.8 57.45,20.64 R59.2 | R60.2 59.69,22.86 v60.96,22.61 61.21,22.35 R61.2 | v58.42,17.02 58.01,17.02 57.45,17.58
  Bottom 0.305: v60.96,22.61 60.45,19.05 v58.42,17.02
V3_3L10  (via drill 0.6)
  Top 0.305: R66.1 53.59,35.66 U21.3 54.67,36.64 55.12,37.08 C11.2 55.18,38.61 56.9,38.61 57.45,39.17 | 57.45,39.17 U22.8 57.45,42.23 R67.2 | R68.2 59.69,44.45 v60.96,44.2 61.21,43.94 R69.2 | v58.42,38.61 58.01,38.61 57.45,39.17
  Bottom 0.305: v60.96,44.2 60.45,40.64 v58.42,38.61
V3_3L11
  Top 0.305: U23.3 56.72,58.92 U24.1 55.61,60.83 R72.1 C12.2
V5F  (via drill 0.6)
  Top 0.305: X1.1 17.78,6.35 v18.54,8.89 | U1.1 9.65,15.05 | 9.65,15.05 9.32,15.05 R13.2 | 9.65,15.05 9.76,14.94 R1.2 9.91,13.32 9.91,11.94 8.89,10.92 8.89,6.35 v10.16,6.35
  Bottom 0.305: v18.54,8.89 17.78,6.35 v10.16,6.35
V5F1  (via drill 0.6)
  Top 0.305: X2.1 17.78,27.94 v18.54,30.48 | U2.1 9.65,36.64 | 9.65,36.64 9.32,36.64 R8.2 | 9.65,36.64 9.76,36.53 R9.2 9.91,34.91 9.91,33.53 8.89,32.51 8.89,27.94 v10.16,27.94
  Bottom 0.305: v18.54,30.48 17.78,27.94 v10.16,27.94
V5F2  (via drill 0.6)
  Top 0.305: X3.1 17.78,49.53 v18.54,52.07 | U4.1 9.65,58.23 | 9.65,58.23 9.32,58.23 R73.2 | 9.65,58.23 9.76,58.12 R74.2 9.91,56.5 9.91,55.12 8.89,54.1 8.89,49.53 v10.16,49.53
  Bottom 0.305: v18.54,52.07 17.78,49.53 v10.16,49.53
V5F3  (via drill 0.6)
  Top 0.305: X4.1 31.75,6.35 v32.51,8.89 | U5.1 23.62,15.05 | 23.62,15.05 23.29,15.05 R21.2 | 23.62,15.05 23.73,14.94 R22.2 23.88,13.32 23.88,11.94 22.86,10.92 22.86,6.35 v24.13,6.35
  Bottom 0.305: v32.51,8.89 31.75,6.35 v24.13,6.35
V5F4  (via drill 0.6)
  Top 0.305: X5.1 31.75,27.94 v32.51,30.48 | U7.1 23.62,36.64 | 23.62,36.64 23.29,36.64 R29.2 | 23.62,36.64 23.73,36.53 R30.2 23.88,34.91 23.88,33.53 22.86,32.51 22.86,27.94 v24.13,27.94
  Bottom 0.305: v32.51,30.48 31.75,27.94 v24.13,27.94
V5F5  (via drill 0.6)
  Top 0.305: U10.1 31.33,59.11 | 31.33,59.11 R35.2 | R36.2 v31.75,60.96 31.33,60.36 31.33,59.11 | v30.73,53.34 30.73,50.39 X6.1
  Bottom 0.305: v31.75,60.96 32,60.47 32.13,59.07 32.13,57.78 32,57.15 32,54.61 v30.73,53.34
V5F6  (via drill 0.6)
  Top 0.305: X7.1 45.72,6.35 v46.48,8.89 | U12.1 37.59,15.05 | 37.59,15.05 37.26,15.05 R39.2 | 37.59,15.05 37.7,14.94 R40.2 37.85,13.32 37.85,11.94 36.83,10.92 36.83,6.35 v38.1,6.35
  Bottom 0.305: v46.48,8.89 45.72,6.35 v38.1,6.35
V5F7  (via drill 0.6)
  Top 0.305: X8.1 45.72,27.94 v46.48,30.48 | U14.1 37.59,36.64 | 37.59,36.64 37.26,36.64 R47.2 | 37.59,36.64 37.7,36.53 R48.2 37.85,34.91 37.85,33.53 36.83,32.51 36.83,27.94 v38.1,27.94
  Bottom 0.305: v46.48,30.48 45.72,27.94 v38.1,27.94
V5F8  (via drill 0.6)
  Top 0.305: U16.1 46.57,59.11 | 46.57,59.11 R53.2 | R54.2 v46.99,60.96 46.57,60.36 46.57,59.11 | v45.97,53.34 45.97,50.39 X9.1
  Bottom 0.305: v46.99,60.96 47.24,60.47 47.37,59.07 47.37,57.78 47.24,57.15 47.24,54.61 v45.97,53.34
V5F9  (via drill 0.6)
  Top 0.305: X10.1 59.69,6.35 v60.45,8.89 | U18.1 51.56,15.05 | 51.56,15.05 51.23,15.05 R57.2 | 51.56,15.05 51.67,14.94 R58.2 51.82,13.32 51.82,11.94 50.8,10.92 50.8,6.35 v52.07,6.35
  Bottom 0.305: v60.45,8.89 59.69,6.35 v52.07,6.35
V5F10  (via drill 0.6)
  Top 0.305: X11.1 59.69,27.94 v60.45,30.48 | U21.1 51.56,36.64 | 51.56,36.64 51.23,36.64 R65.2 | 51.56,36.64 51.67,36.53 R66.2 51.82,34.91 51.82,33.53 50.8,32.51 50.8,27.94 v52.07,27.94
  Bottom 0.305: v60.45,30.48 59.69,27.94 v52.07,27.94
V5F11  (via drill 0.6)
  Top 0.305: U23.1 59.27,59.11 | 59.27,59.11 R71.2 | R72.2 v59.69,60.96 59.27,60.36 59.27,59.11 | v58.67,53.34 58.67,50.39 X12.1
  Bottom 0.305: v59.69,60.96 59.94,60.47 60.07,59.07 60.07,57.78 59.94,57.15 59.94,54.61 v58.67,53.34

## Text on the board
tNames: SOLTV2
bNames: SOLID T sens V2.3 / (C) 2016 nov / Universiteit Antwerpen / Wim Beaumont | SOLID H sens / (C) 2016 nov / Universe Antwerp / W.Beaumont / V 1.1 | SOLID H sens / (C) 2016 nov / Universe Antwerp / W.Beaumont / V 1.1 | SOLID H sens / (C) 2016 nov / Universe Antwerp / W.Beaumont / V 1.1 | SOLID Environment sensors V3.2 | SOLID T sens V2.3 / (C) 2016 nov / Universiteit Antwerpen / Wim Beaumont | SOLID T sens V2.3 / (C) 2016 nov / Universiteit Antwerpen / Wim Beaumont | SOLID T sens V2.3 / (C) 2016 nov / Universiteit Antwerpen / Wim Beaumont | SOLID T sens V2.3 / (C) 2016 nov / Universiteit Antwerpen / Wim Beaumont | SOLID T sens V2.3 / (C) 2016 nov / Universiteit Antwerpen / Wim Beaumont | SOLID T sens V2.3 / (C) 2016 nov / Universiteit Antwerpen / Wim Beaumont | SOLID T sens V2.3 / (C) 2016 nov / Universiteit Antwerpen / Wim Beaumont | SOLID T sens V2.3 / (C) 2016 nov / Universiteit Antwerpen / Wim Beaumont
_tNames: R4 | T1 | W. Beaumont | T0 | R3 | R10 | R11 | R5 | R1 | R1 | R1 | SOLID Environment sensors V3.2 | R13 | R13 | R13 | R13 | C5 | T2 | U1 | C5 | C5 | C5 | U8 | U1 | U8 | U1 | U8 | U1 | (C) 2016 Universiteit Antwerpen | R1 | U20 | SHV1 | SHV1 | SHV1 | R6 | SOLTV2 | X1 | X1 | X1 | X1 | R4 | R4 | R4 | R4 | T1 | T0 | R3 | T1 | T0 | R3 | T1 | T0 | R3 | T1 | T0 | R3 | R10 | R10 | R10 | R10 | R11 | R11 | R11 | R11 | R5 | R5 | R5 | R5 | R13 | R13 | R13 | R13 | T2 | T2 | T2 | T2 | C5 | C5 | C5 | C5 | U1 | U1 | U1 | U1 | R1 | U20 | R1 | U20 | R1 | U20 | R1 | U20 | R6 | R6 | R6 | R6 | SOLTV2 | SOLTV2 | SOLTV2 | SOLTV2 | X1 | X1 | X1 | X1 | R4 | R4 | R4 | R4 | T1 | T0 | R3 | T1 | T0 | R3 | T1 | T0 | R3 | T1 | T0 | R3 | R10 | R10 | R10 | R10 | R11 | R5 | R11 | R5 | R11 | R5 | R11 | R5 | R13 | R13 | R13 | R13 | C5 | T2 | C5 | T2 | C5 | T2 | C5 | T2 | U1 | U1 | U1 | U1 | R1 | U20 | R1 | U20 | R1 | U20 | R1 | U20 | R6 | R6 | R6 | R6 | SOLTV2 | SOLTV2 | SOLTV2 | SOLTV2 | X1 | X1 | X1 | X1